# Altium PCB CHESSOBC_rev1.PcbDoc (part 4 of 4)
Units mm, origin at the board's own origin, x right, y up, seen from the top; angles counter-clockwise.
Board outline 96.01 x 90.17 mm, 6 copper layers (Top Layer, +3.3V, Layer 2, Layer 3, GND, Bottom Layer), stack 0.816 mm thick; 143 components, 230 nets, 1063 pads, 572 vias.
Unrouted connection lines stored in the file: 5.
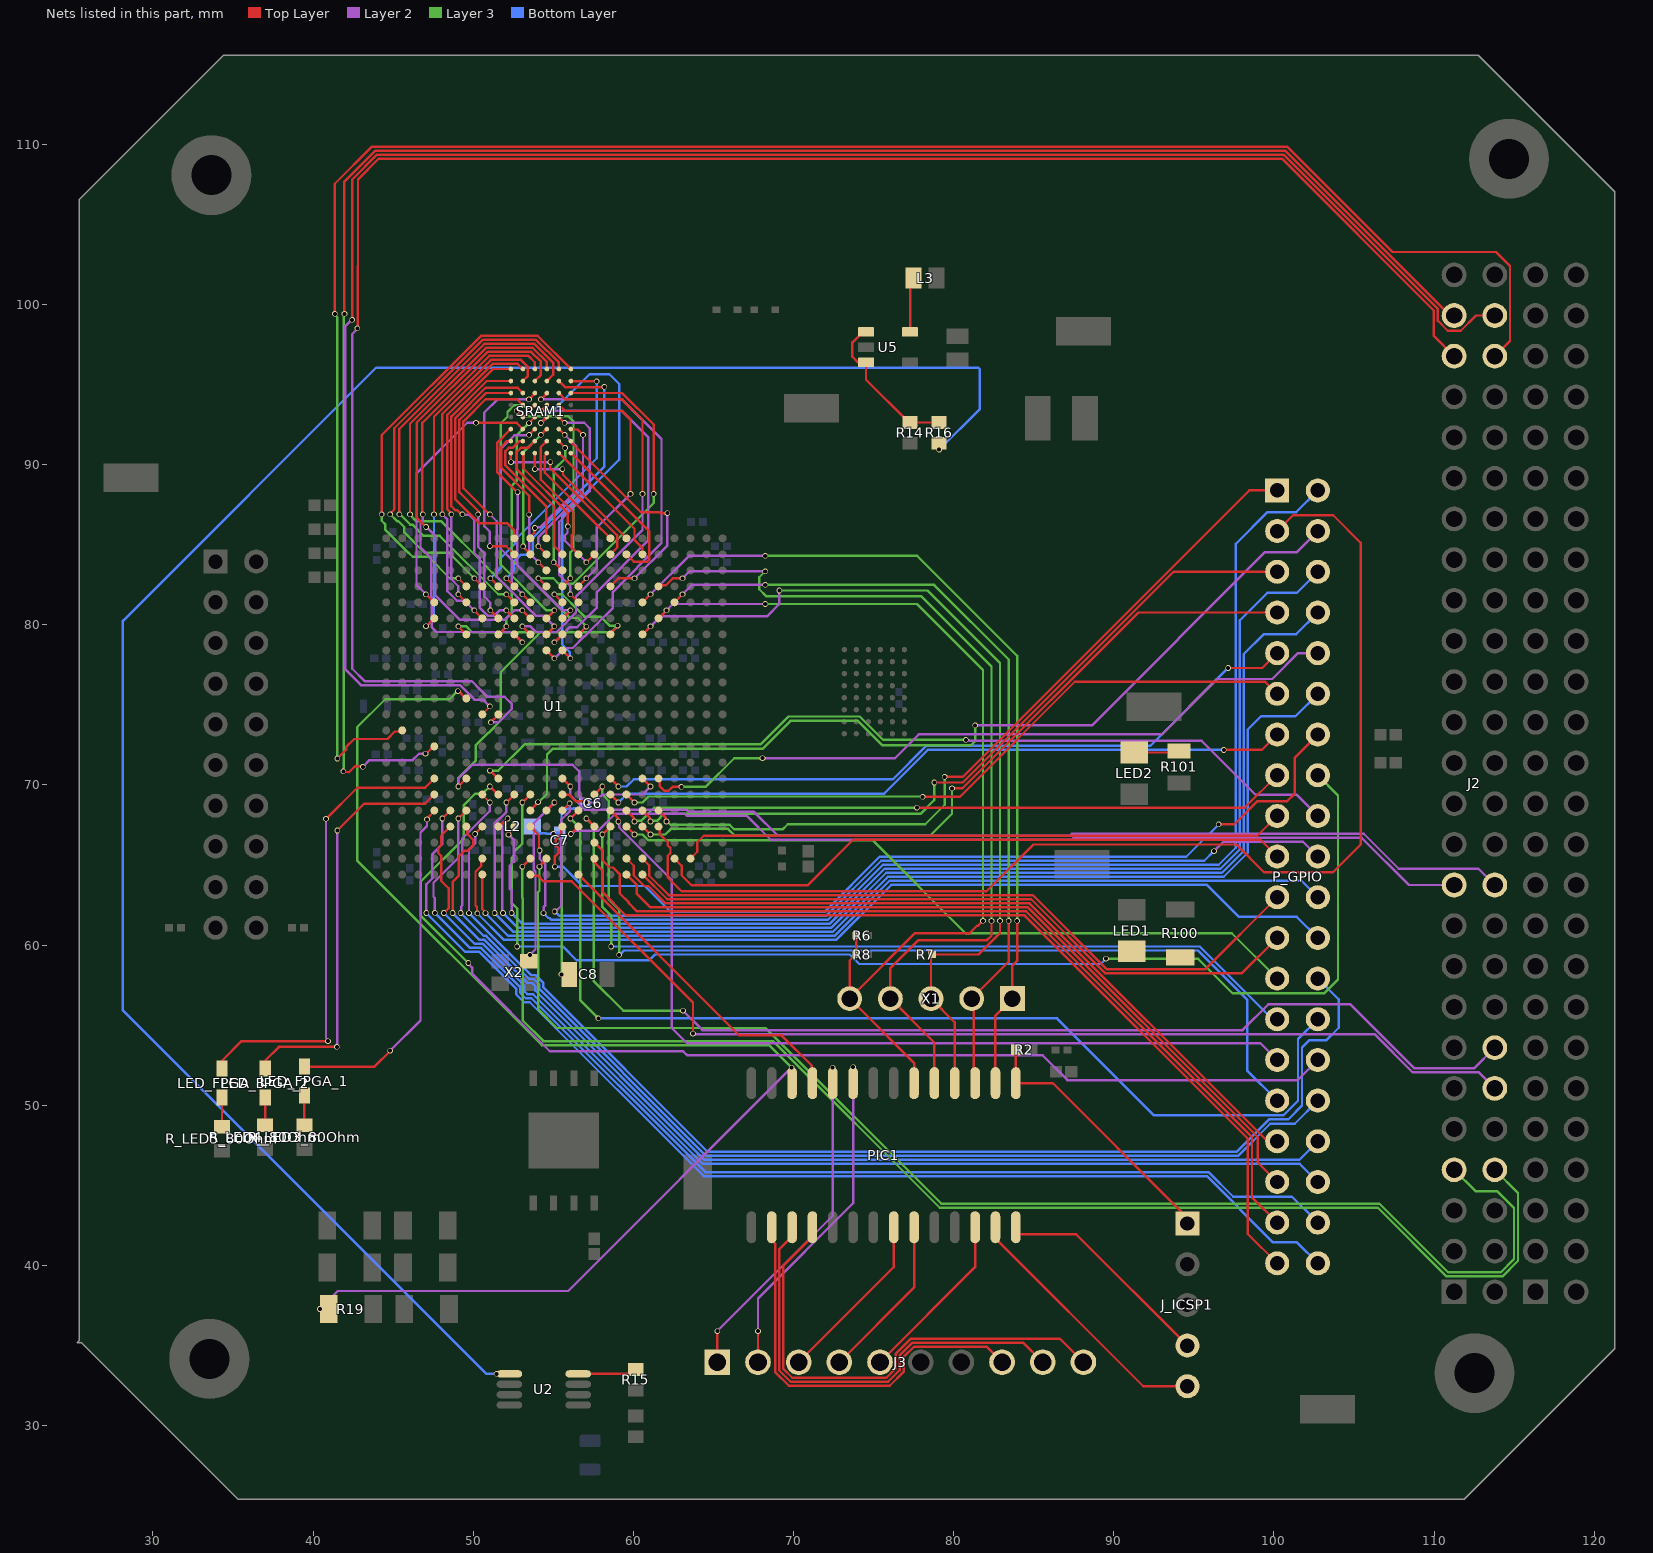
[diagram p7: the nets of this part, all layers, seen from the top]

## Via types
v1: diameter 0.35, hole 0.25, Top Layer to Bottom Layer, tented bottom, 572 vias

## Nets (pads, with @x,y where several pads share a name; then routed paths per layer and width w, separated by ;. In a path a pad name is that pad's centre, name@x,y a point inside that pad or via, vN(x,y) a via of type N, cw(c..) or ccw(c..) an arc to the next point about the centre after c; other vN are vias at no path point) (continued)
NetJ2_7: J2.7 U1.L2 | length 85.6
  Top Layer w0.15: v1(54.141,64.906) 54.141,64.941 54.57,65.371 U1.L2@54.57,65.406
  Layer 3 w0.15: v1(54.141,64.906) 54.141,63.4 54.041,63.3 54.041,60.406 54.07,60.376 54.07,55.971 55.213,54.828 68.258,54.828 79.232,43.854 106.595,43.854 110.882,39.567 114.162,39.567 114.992,40.397 114.992,43.578 113.928,44.642 112.584,44.642 J2.7@111.252,45.974
NetJ2_8: J2.8 U1.K2 | length 85.8
  Top Layer w0.15: v1(53.07,64.906) U1.K2@53.57,65.406
  Layer 3 w0.15: v1(53.07,64.906) 53.07,62.952 53.097,62.924 53.097,55.298 54.385,54.011 68.721,54.011 79.128,43.604 106.492,43.604 110.778,39.317 114.266,39.317 115.242,40.293 115.242,44.524 J2.8@113.792,45.974
NetJ2_12: J2.12 U1.K1 | length 66.9
  Top Layer w0.15: U1.K1@53.57,64.406 53.637,64.339 54.036,64.339 54.394,63.981 56.156,63.981 63.723,56.414 v1(63.723,54.478)
  Layer 2 w0.15: v1(63.723,54.478) 63.754,54.447 106.272,54.447 108.667,52.051 112.795,52.051 J2.12@113.792,51.054
NetJ2_14: J2.14 U1.P4 | length 71.4
  Top Layer w0.15: v1(57.07,67.906) U1.P4@57.57,67.406
  Layer 2 w0.15: v1(63.102,55.905) 63.106,55.905 64.315,54.697 98.041,54.697 99.641,56.297 104.775,56.297 108.771,52.301 112.499,52.301 J2.14@113.792,53.594
  Layer 3 w0.15: v1(57.07,67.906) 57.517,67.459 57.517,57.762 59.369,55.909 63.098,55.909 v1(63.102,55.905)
NetJ2_21: J2.21 U1.N4 | length 58.3
  Top Layer w0.15: v1(56.102,66.938) U1.N4@56.57,67.406
  Layer 2 w0.15: v1(56.102,66.938) 56.156,66.938 56.369,67.151 57.82,67.151 58.875,68.206 63.215,68.206 63.349,68.072 67.092,68.072 68.583,66.581 87.357,66.581 87.483,66.707 105.473,66.707 108.426,63.754 J2.21@111.252,63.754
NetJ2_22: J2.22 U1.M7 | length 61.4
  Top Layer w0.15: U1.M7@55.57,70.406 v1(56.07,69.906)
  Layer 2 w0.15: v1(56.07,69.906) 56.07,69.355 56.969,68.456 63.318,68.456 63.452,68.322 67.533,68.322 69.024,66.831 87.254,66.831 87.38,66.957 105.609,66.957 107.797,64.769 112.777,64.769 J2.22@113.792,63.754
NetJ2_47: J2.47 U1.H11 | length 119.3
  Top Layer w0.15: v1(42.762,98.516) 42.794,98.548 42.794,102.379 42.806,102.391 42.806,107.815 44.101,109.11 100.493,109.11 109.987,99.617 109.987,98.039 J2.47@111.252,96.774 ; v1(51.107,73.906) 51.107,73.924 51.57,74.387 U1.H11@51.57,74.406
  Layer 2 w0.15: v1(42.762,98.516) 42.762,98.479 42.444,98.162 42.444,77.257 43.213,76.488 49.907,76.488 50.424,75.971 50.893,75.502 51.969,75.502 52.42,75.051 52.42,74.761 51.565,73.906 v1(51.107,73.906)
NetJ2_48: J2.48 U1.B10 | length 124.3
  Top Layer w0.15: v1(41.357,99.425) 41.357,107.546 43.671,109.86 100.823,109.86 107.4,103.283 113.858,103.283 114.742,102.399 114.742,97.724 J2.48@113.792,96.774 ; v1(41.514,71.656) 42.063,72.204 42.063,72.365 42.572,72.874 44.64,72.874 45.104,73.339 45.503,73.339 U1.B10@45.57,73.406
  Layer 3 w0.15: v1(41.357,99.425) 41.357,99.37 41.514,99.213 v1(41.514,71.656)
NetJ2_49: J2.49 U1.D9 | length 117.6
  Top Layer w0.15: v1(41.898,70.847) 41.936,70.809 42.232,70.809 42.247,70.794 42.632,71.179 42.782,71.179 42.789,71.171 43.068,71.171 v1(43.107,71.133) ; v1(41.961,99.425) 41.961,107.677 43.894,109.61 100.701,109.61 110.997,99.314 J2.49@111.252,99.314 ; v1(47.022,71.954) 47.07,71.954 47.522,72.406 U1.D9@47.57,72.406
  Layer 2 w0.15: v1(43.107,71.133) 43.53,71.556 46.215,71.556 46.613,71.954 v1(47.022,71.954)
  Layer 3 w0.15: v1(41.898,70.847) 41.929,70.878 41.929,99.393 v1(41.961,99.425)
NetJ2_50: J2.50 U1.G11 | length 118.8
  Top Layer w0.15: v1(42.444,99.045) 42.444,107.807 43.997,109.36 100.597,109.36 110.237,99.721 110.237,98.986 110.858,98.364 111.661,98.364 112.611,99.314 J2.50@113.792,99.314 ; U1.G11@50.57,74.406 50.57,74.422 51.038,74.89 v1(51.038,74.906)
  Layer 2 w0.15: v1(42.444,99.045) 42.408,99.045 42.022,98.66 42.022,77.204 42.988,76.238 49.167,76.238 50.071,75.334 50.61,75.334 v1(51.038,74.906)
NetJ3_1: J3.1 PIC1.10 | length 21.4
  Top Layer w0.15: J3.1@65.244,33.959 v1(65.244,35.899)
  Layer 2 w0.15: v1(65.244,35.899) 72.451,43.106 v1(72.451,52.354)
NetJ3_2: J3.2 PIC1.9 | length 20.9
  Top Layer w0.15: J3.2@67.784,33.959 v1(67.784,35.899)
  Layer 2 w0.15: v1(67.784,35.899) 67.784,37.943 73.721,43.881 v1(73.721,52.383)
NetJ3_3: J3.3 PIC1.22 | length 10.9
  Top Layer w0.15: J3.3@70.324,33.959 76.261,39.896 PIC1.22@76.261,42.383
NetJ3_4: J3.4 PIC1.23 | length 10.4
  Top Layer w0.15: J3.4@72.864,33.959 77.531,38.626 PIC1.23@77.531,42.383
NetJ3_5: J3.5 PIC1.26 | length 10.9
  Top Layer w0.15: J3.5@75.404,33.959 81.341,39.896 PIC1.26@81.341,42.383
NetJ3_8: J3.8 PIC1.16 | length 25.6
  Top Layer w0.15: PIC1.16@68.641,42.383 68.641,41.578 68.849,41.371 68.849,33.348 69.713,32.484 76.015,32.484 76.879,33.348 76.879,34.273 77.54,34.934 82.049,34.934 J3.8@83.024,33.959
NetJ3_9: J3.9 PIC1.17 | length 28.1
  Top Layer w0.15: PIC1.17@69.911,42.383 69.911,41.805 69.099,40.993 69.099,33.451 69.816,32.734 75.911,32.734 76.629,33.451 76.629,34.376 77.436,35.184 84.339,35.184 J3.9@85.564,33.959
NetJ3_10: J3.10 PIC1.18 | length 30.7
  Top Layer w0.15: PIC1.18@71.181,42.383 71.181,41.805 70.899,41.523 69.349,39.973 69.349,33.555 69.92,32.984 75.808,32.984 76.379,33.555 76.379,34.48 77.333,35.434 86.629,35.434 J3.10@88.104,33.959
NetJ_ICSP1_1: J_ICSP1.1 PIC1.1 R2.2 | length 15.7
  Top Layer w0.15: R2.2@83.934,53.459 83.881,53.406 PIC1.1@83.881,51.383 86.192,51.383 94.173,43.403
NetJ_ICSP1_4: J_ICSP1.4 PIC1.28 | length 13.9
  Top Layer w0.15: PIC1.28@83.881,42.383 83.881,42.154 84.089,41.946 87.647,41.946 J_ICSP1.4@94.596,34.997
NetJ_ICSP1_5: J_ICSP1.5 PIC1.27 | length 16.5
  Top Layer w0.15: PIC1.27@82.611,42.383 82.611,41.683 91.838,32.457 J_ICSP1.5@94.596,32.457
NetL3_1: L3.1 U5.5 | length 3.5
  Top Layer w0.15: U5.5@77.281,98.291 77.281,101.449 L3.1@77.488,101.656
NetLED1_1: LED1.1 R100.1
NetLED2_1: LED2.1 R101.1 | length 2.8
  Top Layer w0.15: LED2.1@91.275,72.031 93.981,72.031 R101.1@94.075,72.125
NetLED_FPGA_1_1: LED_FPGA_1.1 R_LED3_80Ohm.1 | length 1.4
  Top Layer w0.15: R_LED3_80Ohm.1@39.46,48.748 39.46,50.112
NetLED_FPGA_1_2: LED_FPGA_1.2 U1.D5 | length 21.9
  Top Layer w0.15: LED_FPGA_1.2@39.46,52.412 43.836,52.412 44.821,53.397 v1(44.821,53.407) ; v1(47.118,67.858) 47.118,67.906 47.57,68.358 U1.D5@47.57,68.406
  Layer 2 w0.15: v1(44.821,53.407) 44.821,53.417 46.707,55.303 46.707,67.038 47.118,67.449 v1(47.118,67.858)
NetLED_FPGA_2_1: LED_FPGA_2.1 R_LED4_80Ohm.1 | length 1.2
  Top Layer w0.15: R_LED4_80Ohm.1@37.009,48.754 37.009,49.983
NetLED_FPGA_2_2: LED_FPGA_2.2 U1.D6 | length 25.8
  Top Layer w0.15: LED_FPGA_2.2@37.009,52.283 37.009,52.783 37.87,53.644 v1(41.488,53.644) ; v1(41.514,67.156) 43.189,68.831 46.995,68.831 U1.D6@47.57,69.406
  Layer 2 w0.15: v1(41.488,53.644) 41.501,53.657 41.501,67.143 v1(41.514,67.156)
NetLED_FPGA_3_1: LED_FPGA_3.1 R_LED5_80Ohm.1 | length 1.3
  Top Layer w0.15: R_LED5_80Ohm.1@34.313,48.667 34.313,49.984
NetLED_FPGA_3_2: LED_FPGA_3.2 U1.D7 | length 29.4
  Top Layer w0.15: LED_FPGA_3.2@34.313,52.284 34.313,52.784 35.54,54.011 v1(40.935,54.011) ; v1(40.811,67.883) 42.759,69.831 46.995,69.831 U1.D7@47.57,70.406
  Layer 2 w0.15: v1(40.811,67.883) 40.811,54.188 40.935,54.065 v1(40.935,54.011)
NetP_GPIO_1: P_GPIO.1 U1.V5 | length 49.4
  Top Layer w0.15: U1.V5@61.57,68.406 62.032,67.944 62.032,67.76 v1(62.07,67.722) ; v1(79.444,70.509) 80.572,70.509 98.454,88.392 P_GPIO.1@100.55,88.392
  Layer 3 w0.15: v1(62.07,67.722) 62.124,67.722 62.34,67.506 66.018,67.506 66.298,67.226 69.316,67.226 69.639,67.55 78.228,67.55 79.444,68.766 v1(79.444,70.509)
NetP_GPIO_2: P_GPIO.2 U1.K4 | length 76.6
  Top Layer w0.15: U1.K4@53.57,67.406 54.112,66.864 54.112,65.938 v1(54.144,65.906)
  Layer 2 w0.15: v1(54.144,65.906) 54.144,65.398 54.491,65.051 54.491,62.469 54.416,62.394 54.416,62.019 v1(54.391,61.994)
  Bottom Layer w0.15: v1(54.391,61.994) 54.689,61.696 54.764,61.696 54.886,61.574 72.143,61.574 75.585,65.016 96.552,65.016 97.618,66.082 97.618,85.058 99.6,87.041 101.392,87.041 P_GPIO.2@102.743,88.392
NetP_GPIO_3: P_GPIO.3 U1.V4 | length 75
  Top Layer w0.15: U1.V4@61.57,67.406 61.637,67.339 61.637,66.94 62.145,66.432 62.145,66.23 62.32,66.055 62.32,65.757 62.145,65.582 62.145,64.23 63.014,63.36 82.055,63.36 84.977,66.282 97.654,66.282 99.397,64.539 103.669,64.539 105.424,66.294 105.424,85.116 103.701,86.839 101.19,86.839 P_GPIO.3@100.203,85.852
NetP_GPIO_4: P_GPIO.4 U1.K5 | length 59.7
  Top Layer w0.15: U1.K5@53.57,68.406 53.57,68.428 54.047,68.906 v1(54.047,68.928)
  Layer 2 w0.15: v1(81.34,73.723) 88.631,73.723 99.453,84.544 101.435,84.544 P_GPIO.4@102.743,85.852
  Layer 3 w0.15: v1(54.047,68.928) 54.092,68.928 54.608,69.444 54.608,71.906 54.958,72.256 58.925,72.256 68.065,72.256 69.809,74 74.025,74 75.556,72.47 81.075,72.47 81.34,72.735 v1(81.34,73.723)
NetP_GPIO_5: P_GPIO.5 U1.U5 | length 47.1
  Top Layer w0.15: U1.U5@60.57,68.406 61.032,67.944 61.032,67.76 v1(61.07,67.722) ; v1(78.794,70.156) 80.572,70.156 93.728,83.312 P_GPIO.5@100.203,83.312
  Layer 3 w0.15: v1(61.07,67.722) 61.108,67.76 61.47,67.76 61.925,68.215 77.952,68.215 78.794,69.057 v1(78.794,70.156)
NetP_GPIO_6: P_GPIO.6 U1.J4 | length 73.9
  Top Layer w0.15: v1(52.205,66.9) 52.205,66.955 52.57,67.319 U1.J4@52.57,67.406
  Layer 2 w0.15: v1(52.205,66.9) 52.52,66.586 52.52,65.205 52.271,64.955 52.271,63.544 52.397,63.417 v1(52.397,62.008)
  Bottom Layer w0.15: v1(52.397,62.008) 53.082,61.324 72.247,61.324 75.688,64.766 96.655,64.766 97.868,65.978 97.868,80.28 99.589,82.002 101.433,82.002 P_GPIO.6@102.743,83.312
NetP_GPIO_7: P_GPIO.7 U1.U4 | length 46.9
  Top Layer w0.15: U1.U4@60.57,67.406 v1(61.07,66.906) ; v1(79.898,69.792) 80.562,69.792 91.542,80.772 P_GPIO.7@100.203,80.772
  Layer 3 w0.15: v1(61.07,66.906) 61.995,66.906 62.345,67.256 65.915,67.256 66.34,66.831 78.525,66.831 79.898,68.203 v1(79.898,69.792)
NetP_GPIO_8: P_GPIO.8 U1.H4 | length 73.5
  Top Layer w0.15: U1.H4@51.57,67.406 51.609,67.406 52.11,67.906 v1(52.149,67.906)
  Layer 2 w0.15: v1(51.861,62.006) 51.861,62.06 51.82,62.101 51.82,67.577 v1(52.149,67.906)
  Bottom Layer w0.15: v1(51.861,62.006) 52.793,61.074 72.35,61.074 75.792,64.516 96.759,64.516 98.118,65.875 98.118,78.169 99.371,79.423 101.394,79.423 P_GPIO.8@102.743,80.772
NetP_GPIO_9: P_GPIO.9 U1.R7 | length 45.3
  Top Layer w0.15: U1.R7@58.57,70.406 v1(59.07,69.906) ; v1(97.139,77.304) 99.275,77.304 P_GPIO.9@100.203,78.232
  Bottom Layer w0.15: v1(59.07,69.906) 59.575,69.906 60.021,70.352 76.198,70.352 78.284,72.438 92.273,72.438 v1(97.139,77.304)
NetP_GPIO_10: P_GPIO.10 U1.V7 | length 45.3
  Top Layer w0.15: U1.V7@61.57,70.406 61.637,70.339 61.637,69.94 61.925,69.652 62.215,69.652 62.444,69.881 v1(62.999,69.881)
  Layer 2 w0.15: v1(68.065,71.674) 76.334,71.674 77.83,73.17 93.005,73.17 96.452,76.617 99.896,76.617 101.511,78.232 P_GPIO.10@102.743,78.232
  Layer 3 w0.15: v1(62.999,69.881) 64.504,69.881 66.297,71.674 v1(68.065,71.674)
NetP_GPIO_11: P_GPIO.11 U1.T6 | length 44.3
  Top Layer w0.15: U1.T6@59.57,69.406 v1(60.07,68.906) ; v1(78.062,69.256) 80.379,69.256 87.565,76.442 99.453,76.442 P_GPIO.11@100.203,75.692
  Layer 3 w0.15: v1(60.07,68.906) 60.575,68.906 60.95,69.281 78.037,69.281 v1(78.062,69.256)
NetP_GPIO_12: P_GPIO.12 U1.J6 | length 70.5
  Top Layer w0.15: v1(52.07,68.906) U1.J6@52.57,69.406
  Layer 2 w0.15: v1(51.338,62.004) 51.338,67.59 52.07,68.322 v1(52.07,68.906)
  Bottom Layer w0.15: v1(51.338,62.004) 52.518,60.824 72.454,60.824 75.895,64.266 96.862,64.266 98.368,65.771 98.368,73.462 99.199,74.293 101.344,74.293 P_GPIO.12@102.743,75.692
NetP_GPIO_13: P_GPIO.13 U1.R6 | length 43.6
  Top Layer w0.15: U1.R6@58.57,69.406 v1(59.07,68.906) ; v1(96.87,72.188) 99.239,72.188 P_GPIO.13@100.203,73.152
  Bottom Layer w0.15: v1(59.07,68.906) 59.62,69.456 75.656,69.456 78.388,72.188 v1(96.87,72.188)
NetP_GPIO_14: P_GPIO.14 U1.M4 | length 57.6
  Top Layer w0.15: v1(55.104,64.906) 55.104,65.541 55.324,65.761 55.324,66.051 55.145,66.23 55.145,66.582 55.503,66.94 55.503,67.339 U1.M4@55.57,67.406 ; v1(96.552,67.542) 97.523,67.542 98.979,68.997 100.835,68.997 101.308,69.47 101.308,71.717 P_GPIO.14@102.743,73.152
  Bottom Layer w0.15: v1(55.104,64.906) 55.607,64.906 56.818,63.695 60.716,63.695 62.337,62.074 71.936,62.074 75.378,65.516 94.526,65.516 v1(96.552,67.542)
NetP_GPIO_15: P_GPIO.15 U1.T5 | length 42.2
  Top Layer w0.15: U1.T5@59.57,68.406 60.032,67.944 60.032,67.76 v1(60.07,67.722) ; v1(77.698,68.581) 98.172,68.581 P_GPIO.15@100.203,70.612
  Layer 3 w0.15: v1(60.07,67.722) 60.108,67.76 60.47,67.76 61.291,68.581 v1(77.698,68.581)
NetP_GPIO_16: P_GPIO.16 U1.K6 | length 76.8
  Top Layer w0.15: v1(53.07,68.906) U1.K6@53.57,69.406
  Layer 3 w0.15: v1(52.747,59.913) 52.747,62.284 52.397,62.634 52.397,65.407 52.555,65.565 52.555,65.836 53.07,66.351 v1(53.07,68.906) ; v1(89.515,59.15) 95.266,59.15 97.429,56.987 103.126,56.987 104.003,57.864 104.003,69.352 P_GPIO.16@102.743,70.612
  Bottom Layer w0.15: v1(52.747,59.913) 55.598,59.913 56.467,59.045 60.987,59.045 61.36,59.418 73.509,59.418 74.106,58.82 89.185,58.82 v1(89.515,59.15)
NetP_GPIO_17: P_GPIO.17 U1.Y2 | length 38.1
  Top Layer w0.15: U1.Y2@63.57,65.406 63.995,65.831 63.995,66.432 64.394,66.831 98.962,66.831 P_GPIO.17@100.203,68.072
NetP_GPIO_18: P_GPIO.18 U1.H7 | length 56.4
  Top Layer w0.15: v1(51.038,70.899) 51.058,70.899 51.551,70.406 U1.H7@51.57,70.406
  Layer 2 w0.15: v1(80.766,72.82) 80.804,72.781 80.99,72.781 81.006,72.765 95.482,72.765 98.863,69.385 101.43,69.385 P_GPIO.18@102.743,68.072
  Layer 3 w0.15: v1(51.038,70.899) 51.568,70.899 53.205,72.536 67.95,72.536 69.694,74.28 74.141,74.28 75.601,72.82 v1(80.766,72.82)
NetP_GPIO_19: P_GPIO.19 U1.W2 | length 40.3
  Top Layer w0.15: U1.W2@62.57,65.406 63.015,64.961 63.015,64.36 63.644,63.731 70.873,63.731 73.723,66.581 99.154,66.581 P_GPIO.19@100.203,65.532
NetP_GPIO_20: P_GPIO.20 U1.M5 | length 57.9
  Top Layer w0.15: U1.M5@55.57,68.406 v1(56.022,68.858)
  Layer 2 w0.15: v1(55.091,62.101) 55.145,62.101 55.502,62.459 55.502,67.833 56.022,68.353 v1(56.022,68.858) ; v1(96.261,65.875) 96.843,66.457 101.818,66.457 P_GPIO.20@102.743,65.532
  Bottom Layer w0.15: v1(55.091,62.101) 55.103,62.101 55.38,61.824 72.04,61.824 75.481,65.266 95.652,65.266 v1(96.261,65.875)
NetP_GPIO_21: P_GPIO.21 U1.U2 | length 45
  Top Layer w0.15: U1.U2@60.57,65.406 60.995,64.981 60.995,64.335 62.219,63.11 84.95,63.11 89.577,58.484 95.695,58.484 P_GPIO.21@100.203,62.992
  Layer 2 w0.15: P_GPIO.21@99.995,62.992 P_GPIO.21@100.203,62.992
NetP_GPIO_22: P_GPIO.22 U1.G1 | length 56.9
  Top Layer w0.15: U1.G1@50.57,64.406 50.57,62.248 50.769,62.048 v1(50.769,61.994)
  Bottom Layer w0.15: v1(50.769,61.994) 52.189,60.574 72.558,60.574 75.999,64.016 101.719,64.016 P_GPIO.22@102.743,62.992
NetP_GPIO_23: P_GPIO.23 U1.U1 | length 43.3
  Top Layer w0.15: U1.U1@60.57,64.406 62.116,62.86 84.847,62.86 89.473,58.234 97.985,58.234 P_GPIO.23@100.203,60.452
  Layer 2 w0.15: P_GPIO.23@100.006,60.452 P_GPIO.23@100.203,60.452
NetP_GPIO_24: P_GPIO.24 U1.G2 | length 59.6
  Top Layer w0.15: v1(50.256,61.989) 50.236,62.009 50.236,62.389 50.145,62.479 50.145,64.582 50.503,64.94 50.503,65.339 U1.G2@50.57,65.406
  Bottom Layer w0.15: v1(50.256,61.989) 51.92,60.324 72.661,60.324 76.102,63.766 95.818,63.766 97.818,61.766 101.429,61.766 P_GPIO.24@102.743,60.452
NetP_GPIO_25: P_GPIO.25 U1.T4 | length 44.6
  Top Layer w0.15: U1.T4@59.57,67.406 v1(60.07,66.906)
  Layer 3 w0.15: v1(60.07,66.906) 60.575,66.906 60.925,66.556 74.924,66.556 80.734,60.746 97.369,60.746 P_GPIO.25@100.203,57.912
NetP_GPIO_26: P_GPIO.26 U1.G4 | length 75.3
  Top Layer w0.15: v1(50.118,66.954) U1.G4@50.57,67.406
  Layer 2 w0.15: v1(49.74,61.997) 49.74,65.975 50.118,66.353 v1(50.118,66.954)
  Bottom Layer w0.15: v1(49.74,61.997) 53.6,58.137 53.883,58.137 54.381,57.639 54.381,57.356 64.647,47.089 97.663,47.089 99.69,49.117 100.89,49.117 101.754,49.981 101.754,53.611 102.213,54.07 103.273,54.07 104.045,54.842 104.045,56.61 P_GPIO.26@102.743,57.912
NetP_GPIO_27: P_GPIO.27 U1.R4 | length 51.4
  Top Layer w0.15: v1(58.07,66.906) U1.R4@58.57,67.406
  Layer 3 w0.15: v1(58.07,66.906) 58.07,62.391 58.614,61.847 v1(58.614,59.918)
  Bottom Layer w0.15: v1(58.614,59.918) 95.364,59.918 99.91,55.372 P_GPIO.27@100.203,55.372
NetP_GPIO_28: P_GPIO.28 U1.N5 | length 66.1
  Top Layer w0.15: v1(56.07,67.906) U1.N5@56.57,68.406
  Layer 3 w0.15: v1(56.07,67.906) 56.695,67.281 56.695,56.551 v1(57.818,55.428)
  Bottom Layer w0.15: v1(57.818,55.428) 86.458,55.428 92.519,49.367 100.586,49.367 101.504,50.285 101.504,54.133 P_GPIO.28@102.743,55.372
NetP_GPIO_29: P_GPIO.29 U1.R5 | length 53.8
  Top Layer w0.15: U1.R5@58.57,68.406 59.032,67.944 59.032,67.76 v1(59.07,67.722)
  Layer 2 w0.15: v1(59.07,67.722) 59.108,67.684 59.108,67.363 62.387,64.084 62.387,54.843 63.352,53.878 99.157,53.878 P_GPIO.29@100.203,52.832
NetP_GPIO_30: P_GPIO.30 U1.H6 | length 71.9
  Top Layer w0.15: v1(51.038,69.906) 51.054,69.906 51.554,69.406 U1.H6@51.57,69.406
  Layer 2 w0.15: v1(49.693,58.886) 49.693,58.84 49.953,58.58 49.953,58.204 54.779,53.378 63.111,53.378 63.376,53.112 85.565,53.112 87.102,51.575 101.486,51.575 P_GPIO.30@102.743,52.832
  Layer 3 w0.15: v1(49.693,58.886) 46.72,61.859 46.72,63.955 49.42,66.655 49.42,68.751 50.128,69.459 50.592,69.459 v1(51.038,69.906)
NetP_GPIO_31: P_GPIO.31 U1.P6 | length 59.3
  Top Layer w0.15: U1.P6@57.57,69.406 v1(58.07,69.906)
  Layer 3 w0.15: v1(58.07,69.906) 58.07,69.401 58.467,69.004 58.467,62.851 59.118,62.199 v1(59.118,59.395)
  Bottom Layer w0.15: v1(59.118,59.395) 59.138,59.395 59.411,59.668 95.261,59.668 98.329,56.6 98.329,52.166 P_GPIO.31@100.203,50.292
NetP_GPIO_32: P_GPIO.32 U1.G6 | length 69.7
  Top Layer w0.15: U1.G6@50.57,69.406 50.57,69.39 51.038,68.922 v1(51.038,68.906)
  Layer 2 w0.15: v1(49.222,62.01) 49.245,62.033 49.245,62.41 49.32,62.485 49.32,66.651 51.038,68.369 v1(51.038,68.906)
  Bottom Layer w0.15: v1(49.222,62.01) 50.657,60.574 50.809,60.574 53.496,57.887 53.779,57.887 54.131,57.535 54.131,57.252 64.544,46.839 97.766,46.839 99.771,48.845 101.296,48.845 P_GPIO.32@102.743,50.292
NetP_GPIO_33: P_GPIO.33 U1.T2 | length 48.3
  Top Layer w0.15: U1.T2@59.57,65.406 60.022,64.954 60.022,64.353 60.68,63.695 60.927,63.695 62.012,62.61 84.743,62.61 99.602,47.752 P_GPIO.33@100.203,47.752
NetP_GPIO_34: P_GPIO.34 U1.F4 | length 67.3
  Top Layer w0.15: v1(48.712,62.004) 48.712,63.947 49.108,64.343 49.108,65.546 49.467,65.904 49.669,65.904 49.995,66.23 49.995,66.582 49.637,66.94 49.637,67.339 U1.F4@49.57,67.406
  Bottom Layer w0.15: v1(48.712,62.004) 50.391,60.324 50.705,60.324 53.393,57.637 53.676,57.637 53.881,57.432 53.881,57.149 64.44,46.589 101.58,46.589 P_GPIO.34@102.743,47.752
NetP_GPIO_35: P_GPIO.35 U1.T1 | length 49.8
  Top Layer w0.15: U1.T1@59.57,64.406 60.221,63.755 60.221,63.2 61.061,62.36 84.64,62.36 99,48 99,46.415 P_GPIO.35@100.203,45.212
NetP_GPIO_36: P_GPIO.36 U1.E4 | length 67.8
  Top Layer w0.15: v1(48.166,62.004) 48.462,62.3 48.462,63.553 47.995,64.019 47.995,65.582 47.816,65.761 47.816,66.051 47.995,66.23 47.995,66.831 U1.E4@48.57,67.406
  Bottom Layer w0.15: v1(48.166,62.004) 50.096,60.074 50.602,60.074 53.181,57.495 53.181,57.142 53.386,56.937 53.739,56.937 64.337,46.339 101.616,46.339 P_GPIO.36@102.743,45.212
NetP_GPIO_37: P_GPIO.37 U1.P3 | length 55.8
  Top Layer w0.15: U1.P3@57.57,66.406 58.07,65.906 58.07,65.305 58.526,64.849 58.728,64.849 59.145,64.432 59.145,63.235 59.72,62.66 59.72,62.617 60.226,62.11 84.536,62.11 98.631,48.016 98.631,44.244 P_GPIO.37@100.203,42.672
NetP_GPIO_38: P_GPIO.38 U1.F5 | length 70.6
  Top Layer w0.15: v1(49.07,67.906) U1.F5@49.57,68.406
  Layer 2 w0.15: v1(47.609,62.017) 47.609,62.937 47.52,63.026 47.52,63.891 49.07,65.441 v1(49.07,67.906)
  Bottom Layer w0.15: v1(47.609,62.017) 49.802,59.824 50.498,59.824 52.931,57.392 52.931,57.038 53.282,56.687 53.636,56.687 64.499,45.824 95.921,45.824 97.458,44.287 101.128,44.287 P_GPIO.38@102.743,42.672
NetP_GPIO_39: P_GPIO.39 U1.P2 | length 57.5
  Top Layer w0.15: U1.P2@57.57,65.406 57.631,65.345 57.631,65.095 58.07,64.656 58.07,63.32 59.53,61.86 84.432,61.86 98.37,47.923 98.37,41.965 P_GPIO.39@100.203,40.132
NetP_GPIO_40: P_GPIO.40 U1.E5 | length 72
  Top Layer w0.15: v1(48.07,67.906) U1.E5@48.57,68.406
  Layer 2 w0.15: v1(47.07,62.004) 47.07,63.795 47.451,64.176 47.451,65.686 48.07,66.305 v1(48.07,67.906)
  Bottom Layer w0.15: v1(47.07,62.004) 49.5,59.574 50.394,59.574 52.681,57.288 52.681,56.935 53.179,56.437 53.532,56.437 64.395,45.574 95.818,45.574 99.951,41.44 101.435,41.44 P_GPIO.40@102.743,40.132
NetPIC1_2: PIC1.2 U1.U18 X1.1 | length 54.4
  Top Layer w0.15: U1.U18@60.57,81.406 v1(61.07,81.906) ; PIC1.2@82.611,51.383 82.611,55.603 X1.1@83.669,56.661 83.669,58.729 83.972,59.032 v1(83.972,61.51)
  Layer 2 w0.15: v1(61.07,81.906) 63.47,84.306 v1(68.237,84.306)
  Layer 3 w0.15: v1(68.237,84.306) 77.725,84.306 83.972,78.058 v1(83.972,61.51)
NetPIC1_3: PIC1.3 U1.W18 X1.2 | length 50.7
  Top Layer w0.15: U1.W18@62.57,81.406 v1(63.07,81.906) ; PIC1.3@81.341,51.383 81.255,51.47 81.255,56.535 X1.2@81.129,56.661 83.439,58.971 v1(83.439,61.51)
  Layer 2 w0.15: v1(63.07,81.906) 63.66,82.496 v1(68.237,82.496)
  Layer 3 w0.15: v1(68.237,82.496) 78.781,82.496 83.439,77.838 v1(83.439,61.51)
NetPIC1_4: PIC1.4 R7.2 U1.U16 X1.3 | length 56.2
  Top Layer w0.15: U1.U16@60.57,79.406 v1(61.07,79.906) ; PIC1.4@80.071,51.383 80.071,55.179 X1.3@78.589,56.661 78.589,59.365 R7.2@78.637,59.413 81.546,59.413 82.894,60.761 v1(82.894,61.51)
  Layer 2 w0.15: v1(61.07,79.906) 61.711,80.548 68.369,80.548 69.115,81.293 v1(69.115,82.146)
  Layer 3 w0.15: v1(69.115,82.146) 78.36,82.146 82.894,77.612 v1(82.894,61.51)
NetPIC1_5: PIC1.5 U1.V19 X1.4 | length 57.1
  Top Layer w0.15: U1.V19@61.57,82.406 61.637,82.473 62.036,82.473 62.469,82.906 v1(63.07,82.906) ; PIC1.5@78.801,51.383 78.801,53.909 X1.4@76.049,56.661 76.049,58.567 77.796,60.315 82.094,60.315 82.362,60.582 v1(82.362,61.51)
  Layer 2 w0.15: v1(63.07,82.906) 63.509,83.345 v1(68.237,83.345)
  Layer 3 w0.15: v1(68.237,83.345) 67.861,82.97 67.861,82.218 68.283,81.796 77.957,81.796 82.362,77.391 v1(82.362,61.51)
NetPIC1_6: PIC1.6 R6.1 R8.2 U1.V17 X1.5 | length 59.4
  Top Layer w0.15: U1.V17@61.57,80.406 v1(62.07,80.906) ; R6.1@73.909,60.599 R8.2@73.909,59.413 73.884,59.413 73.509,59.038 X1.5@73.509,56.661 ; PIC1.6@77.531,51.383 77.531,52.639 X1.5@73.509,56.661 ; v1(81.832,61.51) 81.528,61.206 81.465,61.206 81.007,60.748 77.596,60.748 X1.5@73.509,56.661
  Layer 2 w0.15: v1(62.07,80.906) 62.463,81.299 v1(68.237,81.299)
  Layer 3 w0.15: v1(68.237,81.299) 77.705,81.299 81.832,77.172 v1(81.832,61.51)
NetPIC1_11: PIC1.11 U1.N1 | length 20.6
  Top Layer w0.15: U1.N1@56.57,64.406 66.615,54.361 69.262,54.361 71.139,52.484 71.139,51.426 PIC1.11@71.181,51.383
NetPIC1_12: PIC1.12 R19.1 U1.F12 | length 84.5
  Top Layer w0.15: v1(49.046,75.864) 49.079,75.864 49.537,75.406 U1.F12@49.57,75.406
  Layer 2 w0.15: v1(40.419,37.279) 41.545,38.405 55.933,38.405 v1(69.882,52.355)
  Layer 3 w0.15: v1(49.046,75.864) 49.028,75.864 48.52,75.356 44.505,75.356 42.75,73.601 42.75,65.292 54.282,53.761 68.476,53.761 v1(69.882,52.355)
NetR14_2: R14.2 R16.1 U5.1 U5.3 | length 9.3
  Top Layer w0.15: 74.031,96.391 73.681,96.741 73.681,97.641 74.331,98.291 U5.1@74.531,98.291 ; U5.3@74.531,96.391 74.531,95.309 77.206,92.634 R14.2@77.281,92.634 R16.1@79.09,92.634
NetR15_2: R15.2 U2.8 | length 2.8
  Top Layer w0.15: 57.361,33.23 57.365,33.234 R15.2@60.149,33.234
NetR16_2: R16.2 U2.1 | length 123.2
  Bottom Layer w0.15: v1(51.461,33.23) 50.821,33.23 28.125,55.926 28.125,80.245 43.93,96.049 81.553,96.049 81.641,95.961 81.641,93.485 v1(79.09,90.934)
NetSRAM1_A1: SRAM1.A1 U1.F18 | length 17.3
  Top Layer w0.15: v1(48.635,86.902) 48.635,86.956 48.385,87.206 48.385,93.117 51.244,95.976 SRAM1.A1@52.348,95.976 ; v1(49.07,81.906) U1.F18@49.57,81.406
  Layer 2 w0.15: v1(48.635,86.902) 48.635,82.846 49.07,82.411 v1(49.07,81.906)
NetSRAM1_A2: SRAM1.A2 U1.G17 | length 20.5
  Top Layer w0.15: v1(48.07,86.902) 48.07,93.155 51.211,96.296 52.778,96.296 SRAM1.A2@53.098,95.976 ; v1(50.07,80.906) U1.G17@50.57,80.406
  Layer 2 w0.15: v1(48.07,86.902) 48.385,86.587 48.385,82.096 48.978,81.503 49.473,81.503 v1(50.07,80.906)
NetSRAM1_A3: SRAM1.A3 U1.J16 | length 29.2
  Top Layer w0.15: v1(46.855,86.902) 46.82,86.936 46.82,92.613 51.003,96.796 53.453,96.796 53.848,96.401 SRAM1.A3@53.848,95.976 ; U1.J16@52.57,79.406 v1(53.07,78.906)
  Layer 2 w0.15: v1(46.855,86.902) 46.855,86.479 46.709,86.334 46.709,84.82 47.393,84.135 47.393,81.734 47.402,81.726 47.402,79.863 47.708,79.556 52.42,79.556 v1(53.07,78.906)
NetSRAM1_A4: SRAM1.A4 U1.H16 | length 28.4
  Top Layer w0.15: v1(46.056,86.902) 46.056,92.556 50.796,97.296 53.717,97.296 54.598,96.415 SRAM1.A4@54.598,95.976 ; U1.H16@51.57,79.406 v1(52.07,79.906)
  Layer 3 w0.15: v1(46.056,86.902) 46.056,86.873 46.468,86.46 48.01,86.46 50.688,83.783 50.688,83.761 51.193,83.256 51.215,83.256 52.42,82.051 52.42,80.761 52.07,80.411 v1(52.07,79.906)
NetSRAM1_A5: SRAM1.A5 U1.G19 | length 26.8
  Top Layer w0.15: v1(44.82,86.902) 44.82,86.956 45.067,87.203 45.067,92.274 50.589,97.796 53.924,97.796 55.348,96.372 SRAM1.A5@55.348,95.976 ; v1(50.07,82.906) U1.G19@50.57,82.406
  Layer 3 w0.15: v1(44.82,86.902) 45.243,86.479 45.321,86.479 45.706,86.094 45.706,85.761 46.97,84.497 48.479,84.497 v1(50.07,82.906)
NetSRAM1_A6: SRAM1.A6 U1.F19 | length 27.8
  Top Layer w0.15: v1(44.281,86.902) 44.281,91.841 50.486,98.046 54.028,98.046 SRAM1.A6@56.098,95.976 ; v1(49.07,82.906) U1.F19@49.57,82.406
  Layer 3 w0.15: v1(44.281,86.902) 44.293,86.89 44.293,86.502 44.503,86.291 44.503,85.957 45.968,84.492 45.979,84.492 46.224,84.247 47.199,84.247 48.54,82.906 v1(49.07,82.906)
NetSRAM1_B1: SRAM1.B1 U1.J17 | length 20.4
  Top Layer w0.15: v1(49.32,86.902) 49.266,86.902 49.023,87.145 48.892,87.145 48.635,87.402 48.635,93.013 50.848,95.226 SRAM1.B1@52.348,95.226 ; v1(52.07,80.906) U1.J17@52.57,80.406
  Layer 2 w0.15: v1(49.32,86.902) 49.343,86.878 49.72,86.878 50.065,86.533 50.065,84.49 50.42,84.135 50.42,81.061 50.925,80.556 51.295,80.556 51.645,80.906 v1(52.07,80.906)
NetSRAM1_B2: SRAM1.B2 U1.D17 | length 22.6
  Top Layer w0.15: v1(47.052,79.914) 47.065,79.914 47.557,80.406 U1.D17@47.57,80.406 ; v1(47.554,86.902) 47.554,92.993 51.107,96.546 52.981,96.546 53.418,96.109 53.418,95.546 SRAM1.B2@53.098,95.226
  Bottom Layer w0.15: v1(47.052,79.914) 47.078,79.914 47.554,80.39 v1(47.554,86.902)
NetSRAM1_B3: SRAM1.B3 U1.K17 | length 29.5
  Top Layer w0.15: v1(47.059,86.11) 46.47,86.7 46.47,92.616 50.9,97.046 53.614,97.046 54.226,96.433 54.226,95.604 SRAM1.B3@53.848,95.226 ; v1(53.07,80.906) U1.K17@53.57,80.406
  Layer 2 w0.15: v1(47.059,86.11) 47.091,86.11 47.644,85.558 47.644,81.837 49.175,80.306 51.965,80.306 52.565,80.906 v1(53.07,80.906)
NetSRAM1_B4: SRAM1.B4 U1.J18 | length 28.4
  Top Layer w0.15: v1(45.393,86.902) 45.393,92.246 50.693,97.546 53.821,97.546 54.99,96.377 54.99,95.618 SRAM1.B4@54.598,95.226 ; v1(52.07,81.906) U1.J18@52.57,81.406
  Layer 3 w0.15: v1(45.393,86.902) 45.421,86.902 46.066,86.256 46.201,86.256 46.901,85.556 47.915,85.556 51.565,81.906 v1(52.07,81.906)
NetSRAM1_B5: SRAM1.B5 U1.J19 | length 18.6
  Top Layer w0.15: v1(52.07,82.906) U1.J19@52.57,82.406 ; SRAM1.B5@55.348,95.226 55.732,94.842 58.175,94.842 v1(58.192,94.858) v1@58.209,94.842
  Bottom Layer w0.15: v1(52.07,82.906) 52.544,83.38 52.544,83.964 52.952,84.372 53.503,84.372 53.72,84.588 53.72,85.417 58.192,89.89 v1(58.192,94.858)
NetSRAM1_B6: SRAM1.B6 U1.H19 | length 17.4
  Top Layer w0.15: v1(51.07,82.906) U1.H19@51.57,82.406 ; SRAM1.B6@56.098,95.226 56.108,95.216 57.703,95.216 v1(57.713,95.206)
  Bottom Layer w0.15: v1(51.07,82.906) 51.72,83.556 51.72,84.174 52.596,85.051 52.596,85.284 57.713,90.4 v1(57.713,95.206)
NetSRAM1_C1: SRAM1.C1 U1.H17 | length 17.3
  Top Layer w0.15: v1(50.315,86.902) 50.315,87.1 49.135,88.28 49.135,92.806 50.805,94.476 SRAM1.C1@52.348,94.476 ; v1(51.07,80.906) U1.H17@51.57,80.406
  Layer 2 w0.15: v1(50.315,86.902) 50.315,84.859 50.688,84.485 50.688,81.761 51.07,81.379 v1(51.07,80.906)
NetSRAM1_C2: SRAM1.C2 U1.J22 | length 15.2
  Top Layer w0.15: U1.J22@52.57,85.406 52.57,85.901 52.12,86.351 50.371,86.351 48.885,87.837 48.885,92.91 50.775,94.8 52.774,94.8 SRAM1.C2@53.098,94.476
NetSRAM1_C3: SRAM1.C3 U1.J21 | length 13.9
  Top Layer w0.15: v1(51.038,84.91) 52.066,84.91 U1.J21@52.57,84.406 ; v1(53.485,94.078) 53.848,94.441 SRAM1.C3@53.848,94.476
  Layer 2 w0.15: v1(51.038,84.91) 51.038,85.819 50.688,86.169 50.688,93.257 51.509,94.078 v1(53.485,94.078)
NetSRAM1_C4: SRAM1.C4 U1.L15 | length 26.6
  Top Layer w0.15: v1(54.226,94.078) 54.598,94.45 SRAM1.C4@54.598,94.476 ; U1.L15@54.57,78.406 v1(55.07,77.906)
  Layer 2 w0.15: v1(54.226,94.078) 59.291,94.078 61.761,91.608 61.761,85.102 58.72,82.061 58.72,81.051 57.72,80.051 57.72,80.044 56.976,79.3 56.959,79.3 56.215,78.556 55.72,78.556 v1(55.07,77.906)
NetSRAM1_C5: SRAM1.C5 U1.K16 | length 24.4
  Top Layer w0.15: v1(53.07,79.906) U1.K16@53.57,79.406 ; SRAM1.C5@55.348,94.476 55.746,94.078 59.3,94.078 60.571,92.807 v1(60.571,88.177)
  Layer 2 w0.15: v1(53.07,79.906) 53.575,79.906 53.925,79.556 55.215,79.556 56.42,80.761 56.42,81.772 56.915,82.267 56.925,82.267 60.571,85.912 v1(60.571,88.177)
NetSRAM1_C6: SRAM1.C6 U1.L19 | length 21
  Top Layer w0.15: v1(54.07,82.906) U1.L19@54.57,82.406 ; SRAM1.C6@56.098,94.476 59.3,94.476 61.271,92.505 v1(61.271,88.177)
  Layer 3 w0.15: v1(54.07,82.906) 54.995,82.906 55.345,82.556 56.215,82.556 61.271,87.612 v1(61.271,88.177)
NetSRAM1_D2: SRAM1.D2 U1.L16 | length 20.6
  Top Layer w0.15: v1(51.038,86.902) 51.015,86.902 49.385,88.532 49.385,92.703 50.768,94.086 52.738,94.086 SRAM1.D2@53.098,93.726 ; U1.L16@54.57,79.406 v1(55.07,79.906)
  Layer 2 w0.15: v1(51.038,86.902) 51.47,86.47 51.47,83.011 53.925,80.556 54.42,80.556 v1(55.07,79.906)
NetSRAM1_D3: SRAM1.D3 U1.L17 | length 17.1
  Top Layer w0.15: v1(53.485,93.363) SRAM1.D3@53.848,93.726 ; U1.L17@54.57,80.406 v1(55.07,80.906)
  Layer 3 w0.15: v1(53.485,93.363) 53.136,93.712 52.567,93.712 52.144,93.288 52.144,92.998 51.72,92.574 51.72,83.761 54.575,80.906 v1(55.07,80.906)
NetSRAM1_D4: SRAM1.D4 U1.M16 | length 24.1
  Top Layer w0.15: v1(54.226,93.363) 54.589,93.726 SRAM1.D4@54.598,93.726 ; v1(55.07,78.906) U1.M16@55.57,79.406
  Layer 2 w0.15: v1(54.226,93.363) 59.287,93.363 60.921,91.728 60.921,85.262 57.72,82.061 57.72,81.082 56.491,79.853 56.017,79.853 v1(55.07,78.906)
NetSRAM1_D5: SRAM1.D5 U1.N19 | length 16.6
  Top Layer w0.15: SRAM1.D5@55.348,93.726 55.723,93.351 59.3,93.351 59.82,92.831 v1(59.82,88.177) ; U1.N19@56.57,82.406 v1(57.07,82.906)
  Layer 2 w0.15: v1(57.07,82.906) 57.72,83.556 57.72,86.083 59.814,88.177 v1(59.82,88.177)
NetSRAM1_E2: SRAM1.E2 U1.M19 | length 14.9
  Top Layer w0.15: v1(52.712,93.362) SRAM1.E2@53.098,92.976 ; U1.M19@55.57,82.406 v1(56.07,82.906)
  Layer 3 w0.15: v1(52.712,93.362) 53.061,93.013 55.945,93.013 56.263,92.695 56.263,84.723 56.07,84.53 v1(56.07,82.906)
NetSRAM1_E3: SRAM1.E3 U1.N16 | length 16.6
  Top Layer w0.15: v1(53.485,92.599) 53.848,92.962 SRAM1.E3@53.848,92.976 ; U1.N16@56.57,79.406 56.578,79.406 57.061,79.889 v1(57.07,79.889)
  Layer 3 w0.15: v1(53.485,92.599) 52.708,91.822 52.708,88.981 52.42,88.693 52.42,84.051 56.044,80.427 56.532,80.427 v1(57.07,79.889)
NetSRAM1_E4: SRAM1.E4 U1.M15 | length 26.5
  Top Layer w0.15: v1@54.226,92.599 v1(54.226,92.604) SRAM1.E4@54.598,92.976 ; U1.M15@55.57,78.406 v1(56.07,77.906)
  Layer 2 w0.15: v1(54.226,92.604) v1@54.28,92.604
  Bottom Layer w0.15: v1(54.226,92.604) 55.19,93.568 57.28,95.658 58.494,95.658 59.12,95.032 59.12,90.316 55.563,86.759 55.563,78.773 56.032,78.304 56.032,77.944 v1(56.07,77.906)
NetSRAM1_E5: SRAM1.E5 U1.N18 | length 14.4
  Top Layer w0.15: SRAM1.E5@55.348,92.976 v1(55.707,92.617) ; v1(56.07,81.906) U1.N18@56.57,81.406
  Layer 2 w0.15: v1(55.707,92.617) 56.936,92.617 57.282,92.271 57.282,88.347 55.369,86.434 55.369,83.112 56.07,82.411 v1(56.07,81.906)
NetSRAM1_F1: SRAM1.F1 U1.M17 | length 14.6
  Top Layer w0.15: SRAM1.F1@52.348,92.226 51.508,91.386 51.508,89.515 52.738,88.286 v1(52.77,88.286) ; U1.M17@55.57,80.406 v1(56.07,80.906)
  Layer 2 w0.15: v1(52.77,88.286) 52.77,85.977 52.745,85.952 52.745,83.736 55.575,80.906 v1(56.07,80.906)
NetSRAM1_F2: SRAM1.F2 U1.D18 | length 16.6
  Top Layer w0.15: v1(47.043,81.906) 47.543,81.406 U1.D18@47.57,81.406 ; v1(50.176,92.616) 52.708,92.616 SRAM1.F2@53.098,92.226
  Layer 2 w0.15: v1(47.043,81.906) 46.459,82.49 46.459,89.445 49.63,92.616 v1(50.176,92.616)
NetSRAM1_F3: SRAM1.F3 U1.K18 | length 13
  Top Layer w0.15: v1(53.07,81.906) U1.K18@53.57,81.406 ; v1(53.491,91.868) SRAM1.F3@53.848,92.226
  Layer 2 w0.15: v1(53.07,81.906) 52.42,82.556 52.42,84.051 51.72,84.751 51.72,90.982 52.568,91.83 53.452,91.83 v1(53.491,91.868)
NetSRAM1_F4: SRAM1.F4 U1.K21 | length 8.6
  Top Layer w0.15: v1(53.12,84.906) 53.12,84.881 53.57,84.431 U1.K21@53.57,84.406 ; v1(54.226,91.868) 54.584,92.226 SRAM1.F4@54.598,92.226
  Layer 3 w0.15: v1(53.12,84.906) 53.12,90.762 v1(54.226,91.868)
NetSRAM1_F5: SRAM1.F5 U1.K22 | length 8.6
  Top Layer w0.15: U1.K22@53.57,85.406 53.57,85.501 53.815,85.746 53.815,86.007 v1(53.853,86.046) ; SRAM1.F5@55.348,92.226 55.355,92.226 v1(55.712,91.868)
  Layer 2 w0.15: v1(53.853,86.046) 53.892,86.084 54.171,86.084 56.452,88.365 56.452,91.135 55.719,91.868 v1(55.712,91.868)
NetSRAM1_F6: SRAM1.F6 U1.L21 | length 9.7
  Top Layer w0.15: v1(54.07,84.906) U1.L21@54.57,84.406 ; SRAM1.F6@56.098,92.226 56.124,92.2 56.522,92.2 v1(56.854,91.868)
  Layer 2 w0.15: v1(54.07,84.906) 54.07,85.488 56.854,88.272 v1(56.854,91.868)
NetSRAM1_G1: SRAM1.G1 U1.L20 | length 9.6
  Top Layer w0.15: SRAM1.G1@52.348,91.476 52.111,91.476 51.758,91.123 51.758,89.792 53.491,88.06 v1(53.491,86.878) ; v1(54.07,83.906) U1.L20@54.57,83.406
  Layer 2 w0.15: v1(53.491,86.878) 53.491,84.485 v1(54.07,83.906)
NetSRAM1_G2: SRAM1.G2 U1.L22 | length 7.8
  Top Layer w0.15: SRAM1.G2@53.098,91.466 52.883,91.466 52.463,91.046 52.215,91.046 52.008,90.839 52.008,89.952 54.57,87.391 U1.L22@54.57,85.406
NetSRAM1_G3: SRAM1.G3 U1.M21 | length 9
  Top Layer w0.15: SRAM1.G3@53.848,91.476 53.418,91.046 52.965,91.046 52.738,90.819 52.738,89.709 55.07,87.378 55.07,84.906 U1.M21@55.57,84.406
NetSRAM1_G4: SRAM1.G4 U1.N21 | length 8.3
  Top Layer w0.15: SRAM1.G4@54.598,91.476 54.22,91.098 54.22,89.069 56.263,87.026 56.263,85.7 56.145,85.582 56.145,84.831 U1.N21@56.57,84.406
NetSRAM1_G5: SRAM1.G5 U1.M20 | length 8.8
  Top Layer w0.15: v1(55.019,83.906) 55.045,83.906 55.545,83.406 U1.M20@55.57,83.406 ; SRAM1.G5@55.348,91.476 55.348,91.46 55.746,91.062 v1(55.746,91.046)
  Layer 3 w0.15: v1(55.019,83.906) 55.019,89.666 55.746,90.393 v1(55.746,91.046)
NetSRAM1_G6: SRAM1.G6 U1.R19 | length 14.6
  Top Layer w0.15: SRAM1.G6@56.098,91.476 56.098,91.438 56.168,91.368 56.168,91.334 60.476,87.026 61.65,87.026 61.705,86.971 v1(62.125,86.971) ; U1.R19@58.57,82.406 59.07,82.906 v1(60.07,82.906)
  Layer 2 w0.15: v1(60.07,82.906) 62.125,84.961 v1(62.125,86.971)
NetSRAM1_H1: SRAM1.H1 U1.R21 | length 10.7
  Top Layer w0.15: SRAM1.H1@52.348,90.726 52.353,90.721 52.353,90.164 v1(52.358,90.158) ; v1(54.82,90.161) 54.82,89.757 58.995,85.582 58.995,84.831 U1.R21@58.57,84.406
  Layer 2 w0.15: v1(52.358,90.158) 52.359,90.16 54.819,90.16 v1(54.82,90.161)
NetSRAM1_H2: SRAM1.H2 U1.P21 | length 9.3
  Top Layer w0.15: SRAM1.H2@53.098,90.726 53.122,90.702 53.122,89.774 55.913,86.983 v1(55.913,86.148) ; v1(57.07,83.906) U1.P21@57.57,84.406
  Layer 2 w0.15: v1(55.913,86.148) 55.888,86.123 55.888,85.748 55.719,85.578 55.719,85.257 v1(57.07,83.906)
NetSRAM1_H3: SRAM1.H3 U1.T22 | length 8.7
  Top Layer w0.15: v1(53.848,89.722) SRAM1.H3@53.848,90.726 ; v1(55.57,89.722) 55.608,89.684 55.608,89.368 U1.T22@59.57,85.406
  Layer 2 w0.15: v1(53.848,89.722) v1(55.57,89.722)
NetSRAM1_H4: SRAM1.H4 U1.R22 | length 7.1
  Top Layer w0.15: SRAM1.H4@54.598,90.726 54.598,90.688 54.47,90.56 54.47,89.506 57.52,86.456 U1.R22@58.57,85.406
NetSRAM1_H5: SRAM1.H5 U1.U21 | length 8.5
  Top Layer w0.15: SRAM1.H5@55.348,90.726 59.82,86.254 60.07,86.004 60.07,85.305 60.57,84.805 U1.U21@60.57,84.406
NetSRAM1_H6: SRAM1.H6 U1.T21 | length 10.4
  Top Layer w0.15: SRAM1.H6@56.098,90.726 61,85.824 61,84.086 60.858,83.944 60.032,83.944 U1.T21@59.57,84.406
NetU1_L5: U1.L5 X2.3 | length 10.9
  Top Layer w0.15: U1.L5@54.57,68.406 v1(55.07,68.906)
  Layer 2 w0.15: v1(53.541,59.395) 53.891,59.745 53.891,64.59 53.791,64.69 53.791,67.627 v1(55.07,68.906)
VPLL: C6.2 C7.2 C8.2 L2.1 U1.F7 U1.F16 U1.M6 U1.M18 U1.R16 U1.U7 | length 61.1
  Top Layer w0.15: v1(49.07,69.906) U1.F7@49.57,70.406 ; v1(49.07,79.906) U1.F16@49.57,79.406 ; v1(55.07,81.906) U1.M18@55.57,81.406 ; U1.M6@55.576,69.4 55.975,69.4 56.394,68.981 56.857,68.981 56.894,68.944 57.007,68.944 v1(57.045,68.906) ; U1.R16@58.57,79.406 58.57,79.451 59.025,79.906 v1(59.025,79.951) ; U1.U7@60.57,70.406 v1(61.07,69.906)
  Layer 2 w0.15: v1(49.07,69.906) 49.07,70.401 49.925,71.256 56.215,71.256 56.611,70.86 56.611,69.34 v1(57.045,68.906) 57.575,68.906 58.075,69.406 60.57,69.406 v1(61.07,69.906)
  Layer 3 w0.15: v1(49.07,69.906) 49.07,70.428 50.167,71.525 50.167,72.498 50.925,73.256 50.952,73.256 51.72,74.024 51.72,77.051 54.208,79.539 ; v1(49.07,79.906) 49.575,79.906 49.942,79.539 54.208,79.539 ; v1(55.004,66.954) 55.298,66.66 55.381,66.66 55.539,66.501 55.539,58.198 v1(55.516,58.175) ; v1(55.07,81.906) 55.565,81.906 56.58,80.891 56.58,80.88 56.946,80.514 57.957,80.514 58.52,79.951 v1(59.025,79.951) 58.614,79.539 54.208,79.539
  Bottom Layer w0.15: L2.1@53.649,67.42 54.074,66.995 54.529,66.995 54.57,66.954 v1(55.004,66.954) ; v1@55.004,67.021 55.087,67.021 C7.2@55.405,67.021 55.514,67.13 55.514,68.163 55.86,68.508 56.248,68.508 56.3,68.56 56.689,68.56 C6.2@56.974,68.845
pads on no net: COM_Header.13 COM_Header.15 FLASH1.9 J1.5 J1.6 J1.7 J1.8 J1.9 J1.10 J1.11 J1.12 J1.13 J1.14 J1.15 J1.16 J1.25 J1.26 J1.29 J1.31 J1.42 J1.44 J1.45 J1.46 J1.47 J1.48 J1.49 J1.50 J1.51 J1.52 J2.1 J2.2 J2.9 J2.10 J2.11 J2.13 J2.15 J2.16 J2.17 J2.18 J2.19 J2.20 J2.23 J2.24 J2.33 J2.34 J2.35 J2.36 J2.37 J2.38 J2.39 J2.40 J2.41 J2.42 J2.43 J2.44 J2.45 J2.46 J2.51 J2.52 J3.6 J3.7 U1.A4 U1.A5 U1.A8 U1.A9 U1.A13 U1.A14 U1.A15 U1.A18 U1.A19 U1.AA3 U1.AA4 U1.AA5 U1.AA8 U1.AA9 U1.AA10 U1.AA11 U1.AA12 U1.AA13 U1.AA14 U1.AA15 U1.AA17 U1.AA18 U1.AA19 U1.AA20 U1.AB4 U1.AB5 U1.AB10 U1.AB11 U1.AB14 U1.AB15 U1.AB18 U1.AB19 U1.B3 U1.B4 U1.B5 U1.B6 U1.B8 U1.B9 U1.B11 U1.B12 U1.B13 U1.B14 U1.B15 U1.B16 U1.B18 U1.B19 U1.B20 U1.C2 U1.C3 U1.C4 U1.C6 U1.C7 U1.C10 U1.C11 U1.C12 U1.C13 U1.C16 U1.C17 U1.C19 U1.C20 U1.C21 U1.D1 U1.D2 U1.D3 U1.D11 U1.D15 U1.D20 U1.D21 U1.D22 U1.E1 U1.E2 U1.E14 U1.E16 U1.E21 U1.E22 U1.F1 U1.F2 U1.F3 U1.F8 U1.F9 U1.F14 U1.F20 U1.F21 U1.F22 U1.G3 U1.G5 U1.G9 U1.G18 U1.G20 U1.G21 U1.G22 U1.H1 U1.H2 U1.H5 U1.H18 U1.H21 U1.H22 U1.J1 U1.J2 U1.J3 U1.J5 U1.J7 U1.J20 U1.K3 U1.K7 U1.K19 U1.K20 U1.L1 U1.L3 U1.M1 U1.M8 U1.M22 U1.N3 U1.N6 U1.N17 U1.N20 U1.N22 U1.P1 U1.P7 U1.P20 U1.P22 U1.R1 U1.R2 U1.R17 U1.T3 U1.T11 U1.T19 U1.T20 U1.U3 U1.U8 U1.U19 U1.U20 U1.U22 U1.V1 U1.V2 U1.V21 U1.V22 U1.W1 U1.W3 U1.W6 U1.W16 U1.W20 U1.W21 U1.W22 U1.Y3 U1.Y4 U1.Y6 U1.Y7 U1.Y10 U1.Y11 U1.Y12 U1.Y13 U1.Y16 U1.Y17 U1.Y19 U1.Y20 U1.Y21 U2.3 U2.6 U2.7

## Polygon pours and split planes (outlines as drawn)
+1.5V on Bottom Layer "+1.5V_L06_P000" (solid, pour order 0): 66.455,87.114 66.095,87.474 42.936,87.474 42.936,62.888 43.259,62.565 66.428,62.565
+1.5V on Bottom Layer "+1.5V_L06_P001" (solid, pour order 1): 63.417,87.512 71.35,95.445 80.406,95.445 80.977,94.874 80.977,94.035 73.819,94.035 68.256,88.472 67.963,88.178 66.086,86.301
+3.3V on +3.3V (split plane): 112.547,115.06 120.775,106.832 120.775,35.009 111.676,25.91 35.517,25.91 25.91,35.517 25.91,106.342 34.628,115.06
GND on GND (split plane): 112.547,115.06 120.775,106.832 120.775,35.009 111.676,25.91 35.517,25.91 25.91,35.517 25.91,106.342 34.628,115.06

## Silkscreen, mask and mechanical layers (free items; w line width, h text height)
Top Overlay:
  circle w0.508: c41.91,103.822 r0.992
  circle w0.508: c45.466,107.569 r0.992
  circle w0.508: c45.466,100.076 r0.992
  circle w0.508: c49.022,103.886 r0.992
  lines w0.508: 41.93,102.692 ccw(c45.578,103.642) 43.269,100.662 ; 42.391,106.192 cw(c45.4,103.921) 44.45,107.569 ; 46.416,100.238 ccw(c45.466,103.886) 48.497,101.645 ; 47.772,106.961 cw(c45.501,103.952) 49.149,104.902
  text "CHESS OBC" at 50.927,106.299 h2.03
  text "rev. 0" at 51.181,104.648 h0.76
  text "FPGA" at 62.155,88.423 h2.54
  text "SPI Pull-Ups" at 40.695,43.779 h0.7

## Text inside footprints (layer, text, board x,y; h text height)
COM_Header: Top Overlay "20" at 35.941,59.563 h1.27 r270; Top Overlay "19" at 33.401,59.563 h1.27 r270; Top Overlay "1" at 33.401,86.487 h1.27 r270; Top Overlay "2" at 35.941,86.487 h1.27 r270
J3: Top Overlay "10" at 87.474,35.659 h1.02; Top Overlay "1" at 65.124,35.659 h1.02
P_GPIO: Top Overlay "39" at 99.695,38.1 h1.27 r270; Top Overlay "40" at 102.235,38.1 h1.27 r270; Top Overlay "2" at 102.235,90.932 h1.27 r270; Top Overlay "1" at 99.695,90.932 h1.27 r270